# EAGLE board Amazing-All-Band-Receiver (EAGLE 7.2.0)
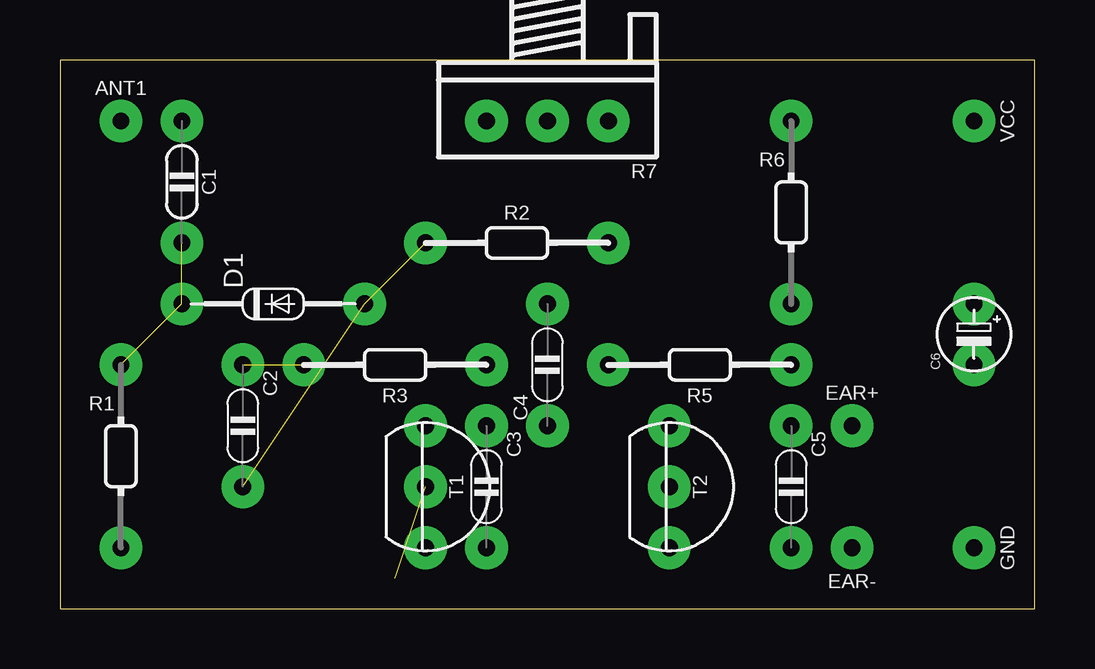
[diagram p0: board, top side]
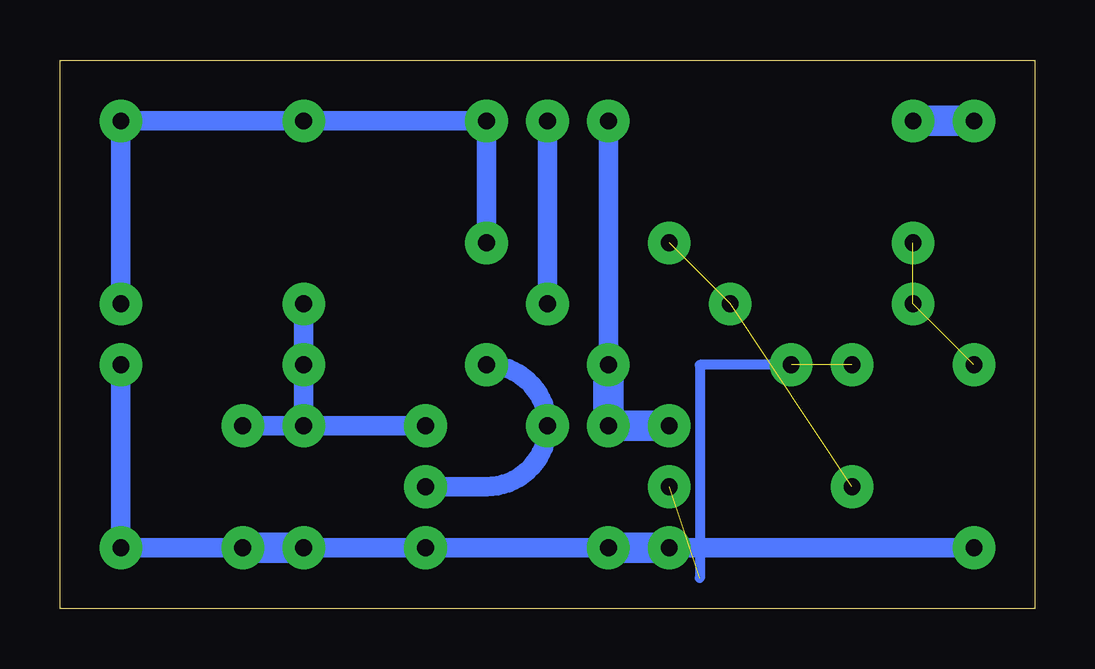
[diagram p1: board, bottom side, seen from below]

Size 40.64 x 22.86 mm. Coordinates in mm from the lower left corner, seen from the top.
Outline: 0,0 40.64,0 40.64,22.86 0,22.86 0,0
Copper layers (1*16): Top 0.035mm / dielectric 1.5mm / Bottom 0.035mm
Design rules "default": minimum track width 10mil, minimum drill 24mil, track to track 8mil, track to pad 8mil, pad to pad 8mil, via to via 8mil, smd to smd 8mil, copper to edge 40mil, drill to drill 8mil, minimum pad ring 10mil, minimum via ring 8mil, stop-mask expansion 4mil, vias tented up to drill 0mil, thermal gap 10mil
Net classes: 0 default: width 0.61 mm

## Footprints (pad centres in the part's own frame; a part is rotated, then mirrored left to right if it is on the bottom)
SPAD = drill 0.7 pad 1.778: 1 0,0
C050-020X036/V = drill 0.7 pad 1.778: 1 0,-2.54; 2 0,2.54
C050-020X036 = drill 0.7 pad 1.778: 1 -2.54,0; 2 2.54,0
E2,5-3 = drill 0.7 pad 1.778: + -1.27,0; - 1.27,0
DO34-7V = drill 0.7 pad 1.778: A 0,-3.81; C 0,3.81
0202/7-V = drill 0.7 pad 1.778: 1 0,3.81; 2 0,-3.81
0202/7 = drill 0.7 pad 1.778: 1 -3.81,0; 2 3.81,0
POT = drill 0.7 pad 1.778: A -2.54,0; E 2.54,0; S 0,0
TO92-CBE = drill 0.7 pad 1.778: 1 0,2.54; 2 0,0; 3 0,-2.54

## Placement (x,y rotation side)
ANT1  ANT  [SPAD]  2.54,20.32 270 top
C1  100p  [C050-020X036/V]  5.08,17.78 180 top
C2  10n  [C050-020X036]  7.62,7.62 270 top
C3  1n  [C050-020X036]  17.78,5.08 270 top
C4  10n  [C050-020X036]  20.32,10.16 90 top
C5  1n  [C050-020X036]  30.48,5.08 270 top
C6  1u  [E2,5-3]  38.1,11.43 270 top
D1  1N34  [DO34-7V]  8.89,12.7 90 top
EAR+  SPAD  [SPAD]  33.02,7.62 270 top
EAR-  SPAD  [SPAD]  33.02,2.54 90 top
GND  SPAD  [SPAD]  38.1,2.54 180 top
R1  10kΩ  [0202/7-V]  2.54,6.35 0 top
R2  10MΩ  [0202/7]  19.05,15.24 0 top
R3  10MΩ  [0202/7]  13.97,10.16 180 top
R5  10MΩ  [0202/7]  26.67,10.16 180 top
R6  100kΩ  [0202/7-V]  30.48,16.51 0 top
R7  100kΩ  [POT]  20.32,20.32 180 top
T1  BC547  [TO92-CBE]  15.24,5.08 0 top
T2  BC547  [TO92-CBE]  25.4,5.08 0 top
VCC  SPAD  [SPAD]  38.1,20.32 180 top

## Library data of the parts
ANT1 EAR+ EAR- GND VCC = pad
C1-C6 = c
D1 = d
R1-R3 R5-R7 = r
T1 T2 = t

## Nets
AC: C1.2 D1.C R1.1
ANT: ANT1.1 C1.1
DC: C2.2 D1.A R2.1
GND: C3.2 C5.2 C6.- EAR-.1 GND.1 R1.2 T1.3 T2.3
I1: C2.1 R3.2 T1.2
I2: C4.1 R5.2 T2.2
O1: C3.1 R3.1 R7.E T1.1
O2: C5.1 EAR+.1 R5.1 R6.2 T2.1
VCC: C6.+ R2.2 R6.1 R7.A VCC.1
VO1: C4.2 R7.S

## Tracks (layer width: path | path; a pad name or v marks a point on that pad's centre or on a via)
AC  (2 unrouted)
ANT
  Bottom 1.27: C1.1 ANT1.1
DC  (2 unrouted)
GND
  Bottom 0.813: R1.2 T1.3 | C3.2 T2.3 C5.2 | EAR-.1 GND.1 C6.-
  Bottom 1.27: C5.2 EAR-.1 | C3.2 T1.3
I1  (2 unrouted)
  Bottom 0.406: R3.2 13.97,10.16 13.97,1.27
I2
  Bottom 0.813: R5.2 arc90 C4.1 arc90 22.86,5.08 T2.2
O1
  Bottom 0.813: R7.E R3.1
  Bottom 1.27: T1.1 C3.1 R3.1
O2
  Bottom 0.813: C5.1 R5.1 R6.2 | EAR+.1 C5.1 | C5.1 T2.1
VCC
  Bottom 0.813: C6.+ VCC.1 R6.1 R7.A R2.2
VO1
  Bottom 0.813: C4.2 R7.S